# Altium PCB PCB_PatternDesignReference.PcbDoc
Units mm, origin at the board's own origin, x right, y up, seen from the top; angles counter-clockwise.
Board outline 90 x 50 mm, 2 copper layers (Top Layer, Bottom Layer); 1 components, 0 nets, 66 pads, 25 vias.
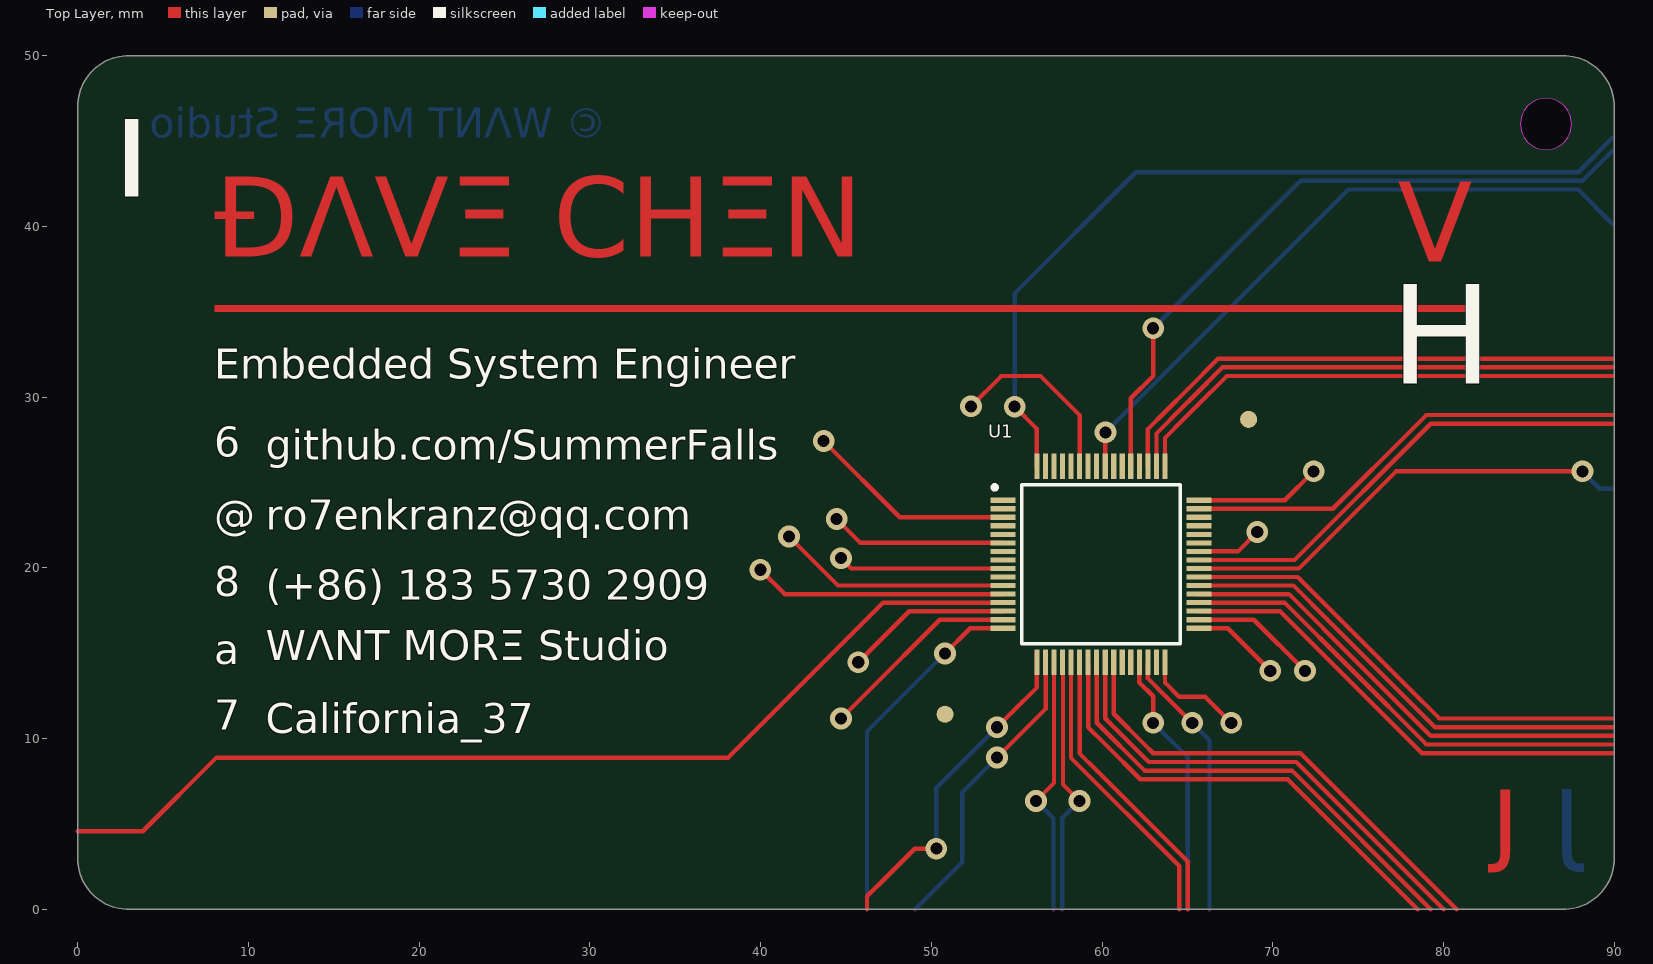
[diagram p0: Top Layer view]
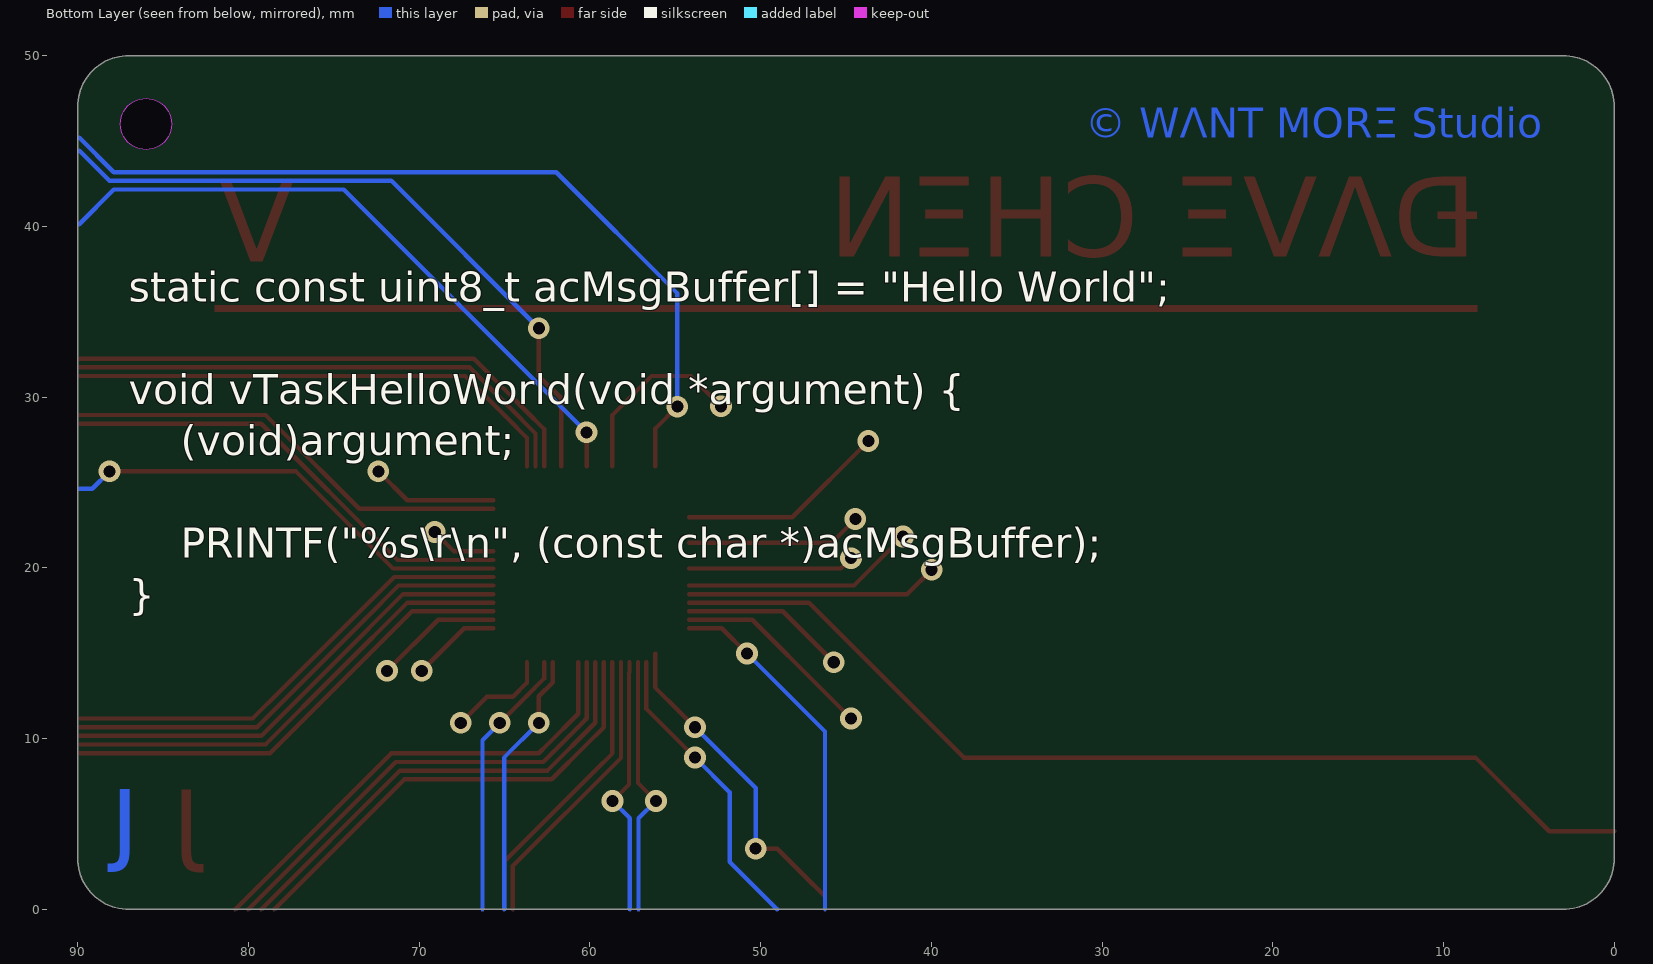
[diagram p1: Bottom Layer view, seen from below]

## Layer stack, top to bottom
Top Solder: solder mask 0.0102, Solder Resist, Dk 3.5
Top Layer: signal copper 0.0356
Dielectric 1: dielectric 0.32, FR-4, Dk 4.8
Bottom Layer: signal copper 0.0356
Bottom Solder: solder mask 0.0102, Solder Resist, Dk 3.5

## Board outline
0,3 0,47 0,47.197 0.051,47.587 0.153,47.966 0.304,48.33 0.5,48.67 0.74,48.982 1.018,49.26 1.33,49.5 1.67,49.696 2.034,49.847 2.413,49.949 2.803,50 3,50 87,50 87.197,50 87.586,49.949 87.966,49.847 88.33,49.696 88.67,49.5 88.982,49.26 89.26,48.982 89.5,48.67 89.696,48.33 89.847,47.966 89.949,47.587 90,47.197 90,47 90,3 90,2.803 89.949,2.413 89.847,2.034 89.696,1.67 89.5,1.33 89.26,1.018 88.982,0.74 88.67,0.5 88.33,0.304 87.966,0.153 87.587,0.051 87.197,0 87,0 3,0 2.803,0 2.413,0.051 2.034,0.153 1.67,0.304 1.33,0.5 1.018,0.74 0.74,1.018 0.5,1.33 0.304,1.67 0.153,2.034 0.051,2.413 0,2.803 0,3
cut-out: 84.5,46 ccw(c86,46) 86,44.5 ccw(c86,46) 87.5,46 ccw(c86,46) 86,47.5 ccw(c86,46)

## Design rules (kind name [scope] priority, off if disabled: settings)
Clearance [All] p1: gap=0.254 ignorepadtopadclearanceinfootprint=FALSE except(0: Arc-Hole Track-Hole SMDPad-Hole THPad-Hole Via-Hole Fill-Hole Poly-Hole Region-Hole Text-Hole)
PolygonConnect [All] p1: connectstyle=Relief reliefconductorwidth=0.254 reliefentries=4 polygonreliefangle="90 Angle" airgapwidth=0.254
RoutingVias [All] p1: holewidth=0.711 width=1.27 viastyle="Through Hole" minholewidth=0.711 minwidth=1.27 maxholewidth=0.711 maxwidth=1.27
SolderMaskExpansion [All] p1: expansion=0.102 istentingtop=FALSE
Width [All] p1: maxlimit=0.254 minlimit=0.254 preferedwidth=0.254
30 further rules are at their usual default settings.

## Components (designator, comment, footprint, x,y, rotation, side; value= is the part's Value field where it differs from the comment)
U1 "STM32G071RBT6" QFP50P1200X1200X160-64N 59.932,20.216 r0 top

## Footprints (in the part's own frame and the unit in brackets; to place one, negate y for a bottom-side part, rotate by r counter-clockwise, add the part's x,y. Pads: shape width x height; smd on the part's side, far side on the other; paste and mask are expansions set on the pad)
QFP50P1200X1200X160-64N [mm]
  rect 1.475x0.3 smd: 1(-5.738,3.75) 2(-5.738,3.25) 3(-5.738,2.75) 4(-5.738,2.25) 5(-5.738,1.75) 6(-5.738,1.25) 7(-5.738,0.75) 8(-5.738,0.25) 9(-5.738,-0.25) 10(-5.738,-0.75) 11(-5.738,-1.25) 12(-5.738,-1.75) 13(-5.738,-2.25) 14(-5.738,-2.75) 15(-5.738,-3.25) 16(-5.738,-3.75) 33(5.738,-3.75) 34(5.738,-3.25) 35(5.738,-2.75) 36(5.738,-2.25) 37(5.738,-1.75) 38(5.738,-1.25) 39(5.738,-0.75) 40(5.738,-0.25) 41(5.738,0.25) 42(5.738,0.75) 43(5.738,1.25) 44(5.738,1.75) 45(5.738,2.25) 46(5.738,2.75) 47(5.738,3.25) 48(5.738,3.75)
  rect 0.3x1.475 smd: 17(-3.75,-5.738) 18(-3.25,-5.738) 19(-2.75,-5.738) 20(-2.25,-5.738) 21(-1.75,-5.738) 22(-1.25,-5.738) 23(-0.75,-5.738) 24(-0.25,-5.738) 25(0.25,-5.738) 26(0.75,-5.738) 27(1.25,-5.738) 28(1.75,-5.738) 29(2.25,-5.738) 30(2.75,-5.738) 31(3.25,-5.738) 32(3.75,-5.738) 49(3.75,5.738) 50(3.25,5.738) 51(2.75,5.738) 52(2.25,5.738) 53(1.75,5.738) 54(1.25,5.738) 55(0.75,5.738) 56(0.25,5.738) 57(-0.25,5.738) 58(-0.75,5.738) 59(-1.25,5.738) 60(-1.75,5.738) 61(-2.25,5.738) 62(-2.75,5.738) 63(-3.25,5.738) 64(-3.75,5.738)
  silkscreen extent -6.35,-4.65 4.65,4.65, body extent -6,-6 6,6, height 1.6

## Part data
U1: "Integrated Circuit", Manufacturer_Name=STMicroelectronics, Mouser Part Number=511-STM32G071RBT6, Arrow Part Number=STM32G071RBT6, Arrow Price/Stock=https://www.arrow.com/en/products/stm32g071rbt6/stmicroelectronics, Datasheet Link=https://www.st.com/resource/en/datasheet/stm32g071rb.pdf, Height=1.6mm, Manufacturer_Part_Number=STM32G071RBT6, Mouser Price/Stock=https://www.mouser.co.uk/ProductDetail/STMicroelectronics/STM32G071RBT6?qs=PqoDHHvF648HnzmnrdeU1A%3D%3D

## Free pads (board coordinates)
  round 1 smd mask+1: 2(50.8,11.43) 3(68.58,28.702)

## Via types
v1: diameter 1.27, hole 0.711, Top Layer to Bottom Layer, tented both sides, 25 vias

## Nets (pads, with @x,y where several pads share a name; then routed paths per layer and width w, separated by ;. In a path a pad name is that pad's centre, name@x,y a point inside that pad or via, vN(x,y) a via of type N, cw(c..) or ccw(c..) an arc to the next point about the centre after c; other vN are vias at no path point)
pads on no net: U1.1 U1.2 U1.3 U1.4 U1.5 U1.6 U1.7 U1.8 U1.9 U1.10 U1.11 U1.12 U1.13 U1.14 U1.15 U1.16 U1.17 U1.18 U1.19 U1.20 U1.21 U1.22 U1.23 U1.24 U1.25 U1.26 U1.27 U1.28 U1.29 U1.30 U1.31 U1.32 U1.33 U1.34 U1.35 U1.36 U1.37 U1.38 U1.39 U1.40 U1.41 U1.42 U1.43 U1.44 U1.45 U1.46 U1.47 U1.48 U1.49 U1.50 U1.51 U1.52 U1.53 U1.54 U1.55 U1.56 U1.57 U1.58 U1.59 U1.60 U1.61 U1.62 U1.63 U1.64
copper on no net: | length 887.1
  Top Layer w0.254: 0,4.572 3.81,4.572 8.128,8.89 38.1,8.89 42.672,13.462 47.176,17.966 54.194,17.966 ; v1(39.983,19.89) 41.408,18.466 54.194,18.466 ; v1(41.656,21.844) 44.534,18.966 54.194,18.966 ; v1(43.688,27.432) 48.154,22.966 54.194,22.966 ; v1(44.45,22.86) 45.844,21.466 54.194,21.466 ; v1(44.704,11.176) 46.228,12.7 50.494,16.966 54.194,16.966 ; v1(44.704,20.574) 45.312,19.966 54.194,19.966 ; v1(45.72,14.478) 48.708,17.466 54.194,17.466 ; 46.228,0 46.228,0.762 47.498,2.032 49.022,3.556 v1(50.292,3.556) ; v1(50.8,14.986) 52.28,16.466 54.194,16.466 ; v1(52.324,29.464) 54.102,31.242 56.388,31.242 58.682,28.948 58.682,25.954 ; v1(53.848,8.89) 56.69,11.732 56.69,14.47 56.682,14.478 ; v1(53.848,10.668) 54.759,11.579 56.182,13.002 56.182,14.478 56.182,14.963 56.159,14.986 ; v1(54.875,29.447) 54.881,29.447 56.134,28.194 56.182,28.146 56.182,25.954 ; v1(56.134,6.35) 57.182,7.398 57.182,14.478 ; 57.682,14.478 57.682,13.89 57.713,13.859 57.713,7.311 v1(58.674,6.35) ; 58.182,14.478 58.182,8.874 64.516,2.54 64.516,0 ; 58.682,14.478 58.682,13.454 58.682,9.136 59.69,8.128 65.024,2.794 65.024,0 ; 59.182,14.478 59.182,10.668 60.198,9.652 62.23,7.62 70.866,7.62 78.486,0 ; 59.682,14.478 59.682,10.93 62.484,8.128 71.12,8.128 79.248,0 ; 60.182,14.478 60.182,11.192 60.452,10.922 62.738,8.636 65.532,8.636 71.374,8.636 73.152,6.858 80.01,0 ; 60.182,25.954 60.182,27.924 v1(60.198,27.94) ; 60.682,14.478 60.682,11.454 62.484,9.652 62.992,9.144 67.818,9.144 71.628,9.144 73.152,7.62 80.772,0 ; 61.682,25.954 61.682,29.932 62.992,31.242 v1(62.992,34.036) ; 62.182,14.478 62.182,13.293 62.992,12.483 v1(62.992,10.922) ; 62.682,14.478 62.682,13.518 63.754,12.446 v1(65.278,10.922) ; 62.682,25.954 62.682,28.138 63.754,29.21 65.024,30.48 66.802,32.258 69.596,32.258 89.916,32.258 ; 63.182,25.954 63.182,27.876 64.77,29.464 65.278,29.972 67.056,31.75 89.916,31.75 ; 63.682,14.478 63.682,13.28 64.516,12.446 66.04,12.446 v1(67.564,10.922) ; 63.682,25.954 63.682,27.614 64.77,28.702 65.532,29.464 67.31,31.242 75.438,31.242 89.916,31.242 ; 65.67,16.466 67.354,16.466 v1(69.85,13.97) ; 65.67,16.966 68.886,16.966 v1(71.882,13.97) ; 65.67,17.466 70.418,17.466 75.692,12.192 78.74,9.144 89.916,9.144 ; 65.67,17.966 70.68,17.966 74.676,13.97 78.994,9.652 89.916,9.652 ; 65.67,18.466 70.942,18.466 74.93,14.478 79.248,10.16 82.804,10.16 89.916,10.16 ; 65.67,18.966 71.204,18.966 73.152,17.018 79.502,10.668 80.772,10.668 89.916,10.668 ; 65.67,19.466 71.466,19.466 77.978,12.954 79.756,11.176 89.916,11.176 ; 65.67,19.966 71.528,19.966 74.93,23.368 77.216,25.654 v1(88.138,25.654) ; 65.67,20.466 71.266,20.466 79.248,28.448 88.392,28.448 89.916,28.448 ; 65.67,20.966 67.956,20.966 v1(69.088,22.098) ; 65.67,23.466 73.504,23.466 78.232,28.194 78.994,28.956 89.916,28.956 ; 65.67,23.966 70.702,23.966 v1(72.39,25.654)
  Bottom Layer w0.254: 46.228,0 46.228,10.414 v1(50.8,14.986) ; 49.022,0 51.816,2.794 51.816,4.826 51.816,6.858 v1(53.848,8.89) ; v1(50.292,3.556) 50.292,7.112 v1(53.848,10.668) ; v1(54.875,29.447) 54.875,36.079 61.976,43.18 87.884,43.18 89.916,45.212 ; v1(56.134,6.35) 57.15,5.334 57.15,0 ; 57.658,0 57.658,4.064 57.658,5.334 v1(58.674,6.35) ; v1(60.198,27.94) 74.422,42.164 78.486,42.164 87.884,42.164 89.916,40.132 ; v1(62.992,10.922) 65.024,8.89 65.024,0 ; v1(62.992,34.036) 71.628,42.672 77.216,42.672 88.138,42.672 89.154,43.688 89.916,44.45 ; v1(65.278,10.922) 66.294,9.906 66.294,0 ; v1(88.138,25.654) 89.154,24.638 89.916,24.638

## Other copper
Top Layer:
  rectangle: 8,35 82,35.4
  text "ÐΛVΞ CHΞN" at 8,36.701 h8
  text "V" at 77.312,36.417 h8
  text "j" at 82.734,2 h8
Bottom Layer:
  text "© WΛNT MORΞ Studio" at 31,44.62 h3
  text "j" at 88.138,2.032 h8

## Silkscreen, mask and mechanical layers (free items; w line width, h text height)
Top Overlay:
  text "I" at 2,39.875 h10
  text "Embedded System Engineer" at 8,30.48 h3
  text "H" at 76.889,28.875 h10
  text "6" at 8,25.93 h3
  text "github.com/SummerFalls" at 11,25.739 h3
  text "@" at 8,21.648 h3
  text "ro7enkranz@qq.com" at 11,21.648 h3
  text "8" at 8,17.752 h3
  text "(+86) 183 5730 2909" at 11,17.561 h3
  text "WΛNT MORΞ Studio" at 11,14.007 h3
  text "a" at 8,13.761 h3
  text "7" at 8,9.93 h3
  text "California_37" at 11,9.739 h3
Bottom Overlay:
  text "static const uint8_t acMsgBuffer[] = \"Hello World\"; /  / void vTaskHelloWorld(void *argument) { /     (void)argument; /  /     PRINTF(\"%s\r\n\", (const char *)acMsgBuffer); / }" at 87,17 h3
Top Solder:
  rectangle: 8,35 82,35.4
  text "ÐΛVΞ CHΞN" at 8,36.701 h8
  text "V" at 77.312,36.417 h8
  text "j" at 82.734,2 h8
Mechanical 1:
  circle w0.15: c86,46 r1.5
  lines w0.254: 0,3 ccw(c3,3) 3,0 87,0 ccw(c87,3) 90,3 90,47 ccw(c87,47) 87,50 3,50 ccw(c3,47) 0,47 0,3